# EAGLE board AUV Electrical Assignment Dhruv Misra (EAGLE 9.7.0)

Size 143.26 x 59.15 mm. Coordinates in mm from the lower left corner, seen from the top.
Outline: 0,0 143.26,0 143.26,59.15 0,59.15 0,0
Copper layers (1*16): Top 0.035mm / dielectric 1.5mm / Bottom 0.035mm
Design rules "default": minimum track width 6mil, minimum drill 0.35mm, track to track 6mil, track to pad 6mil, pad to pad 6mil, via to via 6mil, smd to smd 6mil, copper to edge 40mil, drill to drill 6mil, minimum pad ring 10mil, minimum via ring 8mil, stop-mask expansion 4mil, vias tented up to drill 0mil, thermal gap 10mil

## Footprints (pad centres in the part's own frame; a part is rotated, then mirrored left to right if it is on the bottom)
BATTERY-GENERIC = drill 1.118 pad 3.15 octagon: + 2.54,0; - -2.54,0
CAPPRD254W65D500H1150B = drill 0.85 pad 1.45: 1 -1.27,0; 2 1.27,0
LEDRD254W60D565H860B = drill 0.981 pad 1.581: 1 -1.27,0; 2 1.27,0
RESAD1016W63L850D250B = drill 0.83 pad 1.43: 1 -5.08,0; 2 5.08,0
TO220V = drill 1.016 long: 1 -2.54,-2.54; 2 0,-2.54; 3 2.54,-2.54
DIP762W53P254L1969H508Q14B = drill 0.743 pad 1.343: 1 -3.81,7.62; 2 -3.81,5.08; 3 -3.81,2.54; 4 -3.81,0; 5 -3.81,-2.54; 6 -3.81,-5.08; 7 -3.81,-7.62; 8 3.81,-7.62; 9 3.81,-5.08; 10 3.81,-2.54; 11 3.81,0; 12 3.81,2.54; 13 3.81,5.08; 14 3.81,7.62
DIP826W53P254L959H508Q8B = drill 0.786 pad 1.386: 1 -4.13,3.81; 2 -4.13,1.27; 3 -4.13,-1.27; 4 -4.13,-3.81; 5 4.13,-3.81; 6 4.13,-1.27; 7 4.13,1.27; 8 4.13,3.81

## Placement (x,y rotation side)
BAT1  9V  [BATTERY-GENERIC]  10.11,22.05 60 top
C3  100u  [CAPPRD254W65D500H1150B]  39.96,51.43 60 top
D1  RED  [LEDRD254W60D565H860B]  24.08,9.01 240 top
D2  RED  [LEDRD254W60D565H860B]  125.05,9.18 270 top
D3  RED  [LEDRD254W60D565H860B]  130.13,9.18 270 top
D4  RED  [LEDRD254W60D565H860B]  119.97,9.18 270 top
D5  RED  [LEDRD254W60D565H860B]  135.21,9.18 270 top
R1  10k  [RESAD1016W63L850D250B]  33.61,40.25 240 top
R2  10k  [RESAD1016W63L850D250B]  36.15,40.25 60 top
R3  100  [RESAD1016W63L850D250B]  30.39,23.15 330 top
R4  100  [RESAD1016W63L850D250B]  84.41,49.23 60 top
R5  100  [RESAD1016W63L850D250B]  59.01,12.31 120 top
R6  100  [RESAD1016W63L850D250B]  61.55,49.23 60 top
R7  100  [RESAD1016W63L850D250B]  79.33,12.31 120 top
R8  100  [RESAD1016W63L850D250B]  64.09,10.45 90 top
R9  100  [RESAD1016W63L850D250B]  59.01,9.77 120 top
R10  100  [RESAD1016W63L850D250B]  61.55,47.87 60 top
R11  100  [RESAD1016W63L850D250B]  69.17,47.87 240 top
R12  100  [RESAD1016W63L850D250B]  89.49,47.87 60 top
R13  100  [RESAD1016W63L850D250B]  84.41,10.45 90 top
R14  100  [RESAD1016W63L850D250B]  79.33,9.77 300 top
R15  100  [RESAD1016W63L850D250B]  81.87,45.33 60 top
R16  10k  [RESAD1016W63L850D250B]  114.89,28.91 120 top
R17  10k  [RESAD1016W63L850D250B]  119.97,28.91 120 top
R18  10k  [RESAD1016W63L850D250B]  125.05,28.91 120 top
R19  10k  [RESAD1016W63L850D250B]  130.13,28.91 120 top
U1  LM7805_TO220V  [TO220V]  13.29,25.69 0 top
U2  74HC74_PDIP  [DIP762W53P254L1969H508Q14B]  84.41,29.5 90 top
U3  74HC74_PDIP  [DIP762W53P254L1969H508Q14B]  64.09,29.5 90 top
U555_COUNTER_IC  LM555_DIP  [DIP826W53P254L959H508Q8B]  34.88,29.5 90 top

## Library data of the parts
BAT1 C3 R1-R19 U1-U3 = Tinkercad
D1-D5 = Tinkercad; CATEGORY: Opto-Electronic; SUB-CATEGORY: LED; VALUE: LED_RED
U555_COUNTER_IC = Tinkercad; CATEGORY: IC_Clock-Timing; CURRENT-SUPPLY: 10mA; DESCRIPTION: IC OSC SINGLE TIMER 100KHZ 8-DIP; FREQUENCY: 100kHz; MANUFACTURER: Texas Instruments; MPN: LM555CN/NOPB; OPERATING_TEMP: 0°C to 70°C; PART_STATUS: Active; ROHS_COMPLIANT: ROHS3 Compliant; SUB-CATEGORY: Timer

## Nets
BAT1+: BAT1.+ U1.1
BAT1-: BAT1.- C3.2 D1.2 D2.2 D3.2 D4.2 D5.2 R4.2 R5.1 R6.2 R7.1 U1.2 U2.7 U3.7 U555_COUNTER_IC.1
D1_A: D1.1 R3.1
D2_A: D2.1 R17.1
D3_A: D3.1 R18.1
D4_A: D4.1 R16.1
D5_A: D5.1 R19.1
U2_1!Q: R7.2 R16.2 U2.2 U2.6
U2_2!Q: R4.1 R17.2 U2.8 U2.12
U2_CLK1: U2.3 U2.9
U2_CLR1: R14.1 U2.1
U2_CLR2: R15.1 U2.13
U2_PRE1: R13.2 U2.4
U3_1!Q: R5.2 R19.2 U3.2 U3.6
U3_1Q: U3.5 U3.11
U3_2!Q: R6.1 R18.2 U3.8 U3.12
U3_2Q: R12.1 U2.10 U3.9
U3_CLK1: R3.2 U3.3 U555_COUNTER_IC.3
U3_CLR1: R9.2 U3.1
U3_CLR2: R10.1 U3.13
U3_PRE1: R8.2 U3.4
U3_PRE2: R11.2 U3.10
U555_COUNTER_IC_!RST: R1.2 R8.1 R9.1 R10.2 R11.1 R12.2 R13.1 R14.2 R15.2 U1.3 U2.14 U3.14 U555_COUNTER_IC.4 U555_COUNTER_IC.8
U555_COUNTER_IC_DIS: R1.1 R2.1 U555_COUNTER_IC.7
U555_COUNTER_IC_TR: C3.1 R2.2 U555_COUNTER_IC.2 U555_COUNTER_IC.6

## Tracks (layer width: path | path; a pad name or v marks a point on that pad's centre or on a via)
BAT1+  (1 unrouted)
BAT1-  (14 unrouted)
D1_A  (1 unrouted)
D2_A  (1 unrouted)
D3_A  (1 unrouted)
D4_A  (1 unrouted)
D5_A  (1 unrouted)
U2_1!Q  (3 unrouted)
U2_2!Q  (3 unrouted)
U2_CLK1  (1 unrouted)
U2_CLR1  (1 unrouted)
U2_CLR2  (1 unrouted)
U2_PRE1  (1 unrouted)
U3_1!Q  (3 unrouted)
U3_1Q  (1 unrouted)
U3_2!Q  (3 unrouted)
U3_2Q  (2 unrouted)
U3_CLK1  (2 unrouted)
U3_CLR1  (1 unrouted)
U3_CLR2  (1 unrouted)
U3_PRE1  (1 unrouted)
U3_PRE2  (1 unrouted)
U555_COUNTER_IC_!RST  (13 unrouted)
U555_COUNTER_IC_DIS  (2 unrouted)
U555_COUNTER_IC_TR  (3 unrouted)